# Altium PCB doan1_1.PcbDoc
Units mm, origin at the board's own origin, x right, y up, seen from the top; angles counter-clockwise.
Board outline 102.74 x 96.77 mm, 2 copper layers (Top Layer, Bottom Layer); 25 components, 19 nets, 95 pads, 0 vias.
Unrouted connection lines stored in the file: 3.
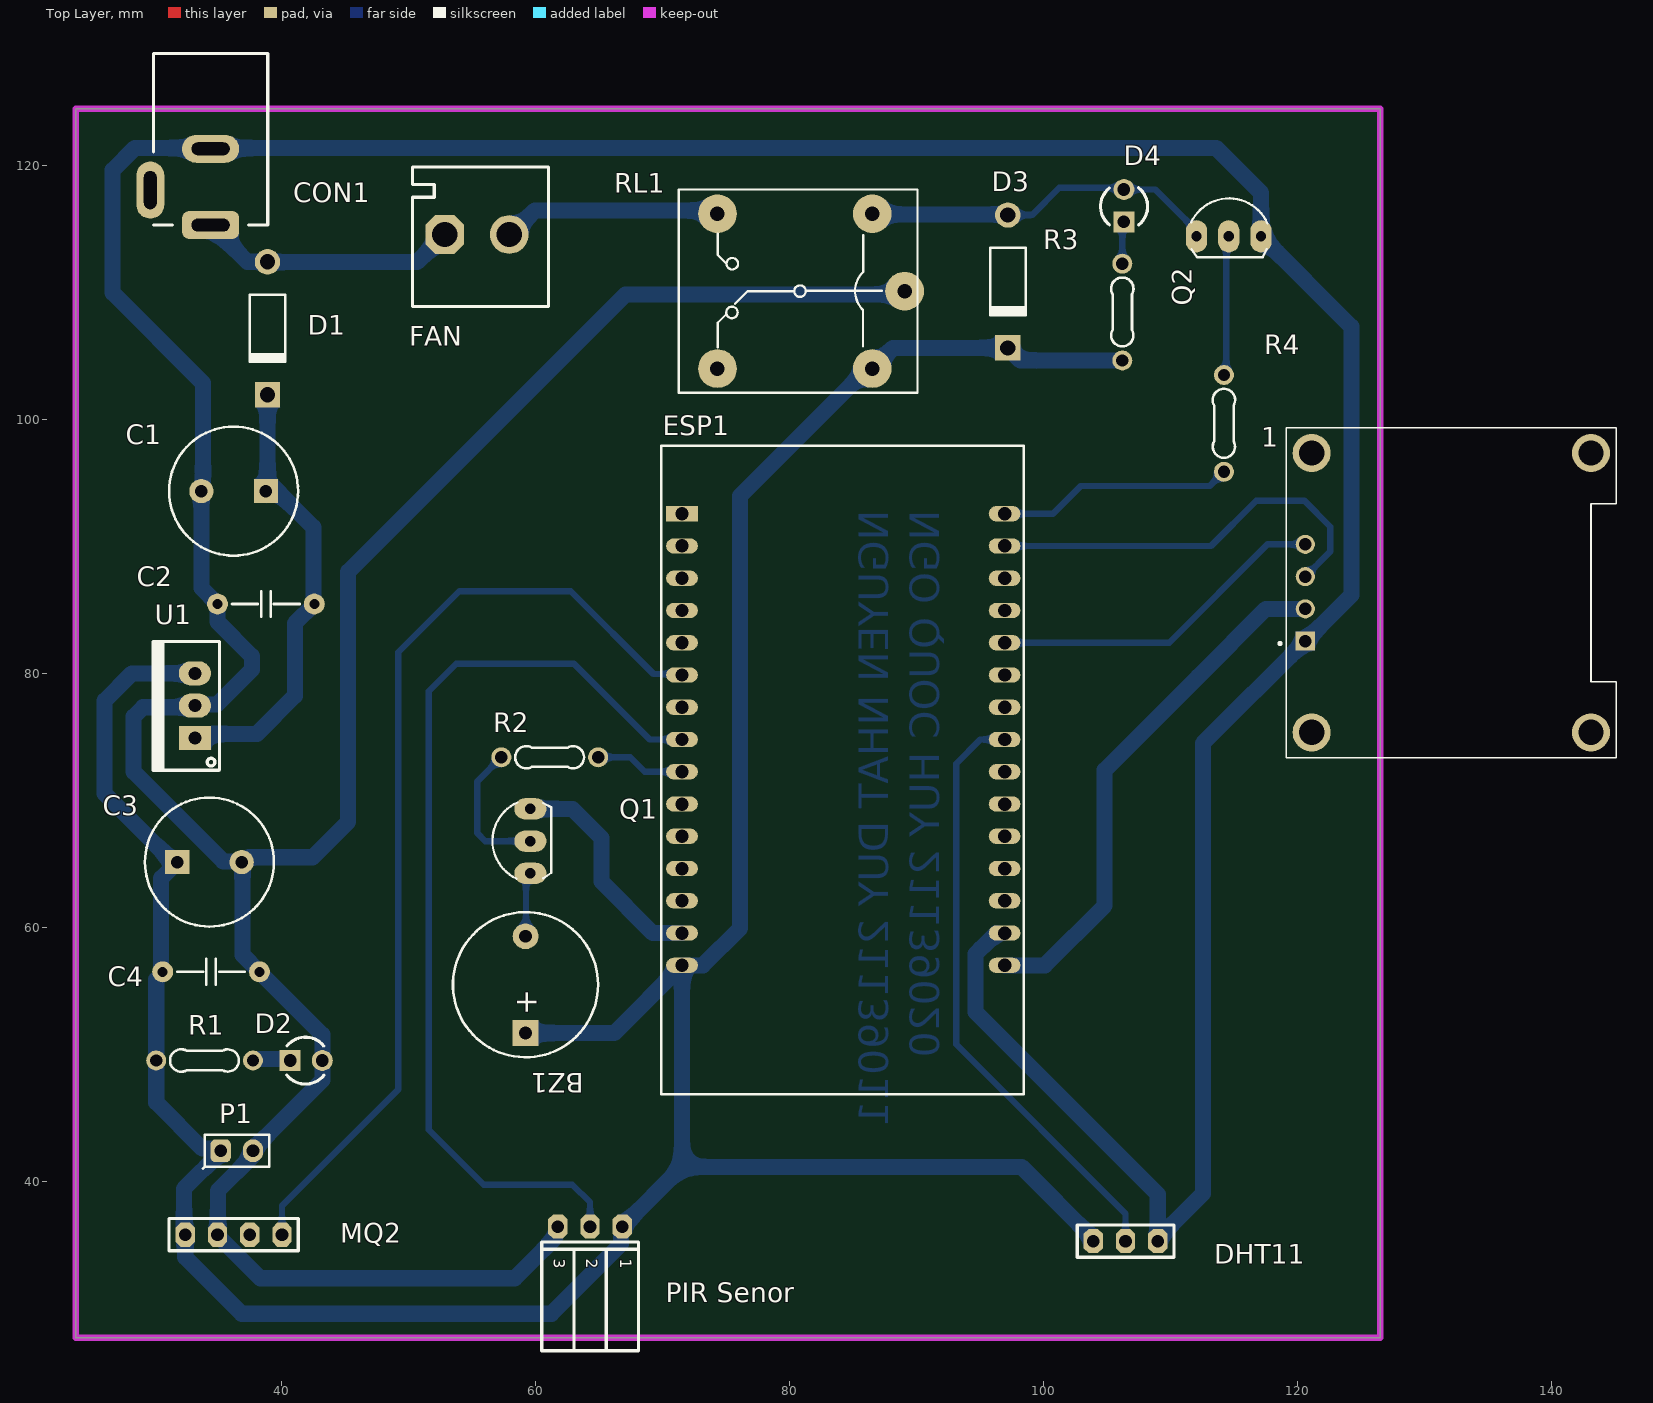
[diagram p0: Top Layer view]
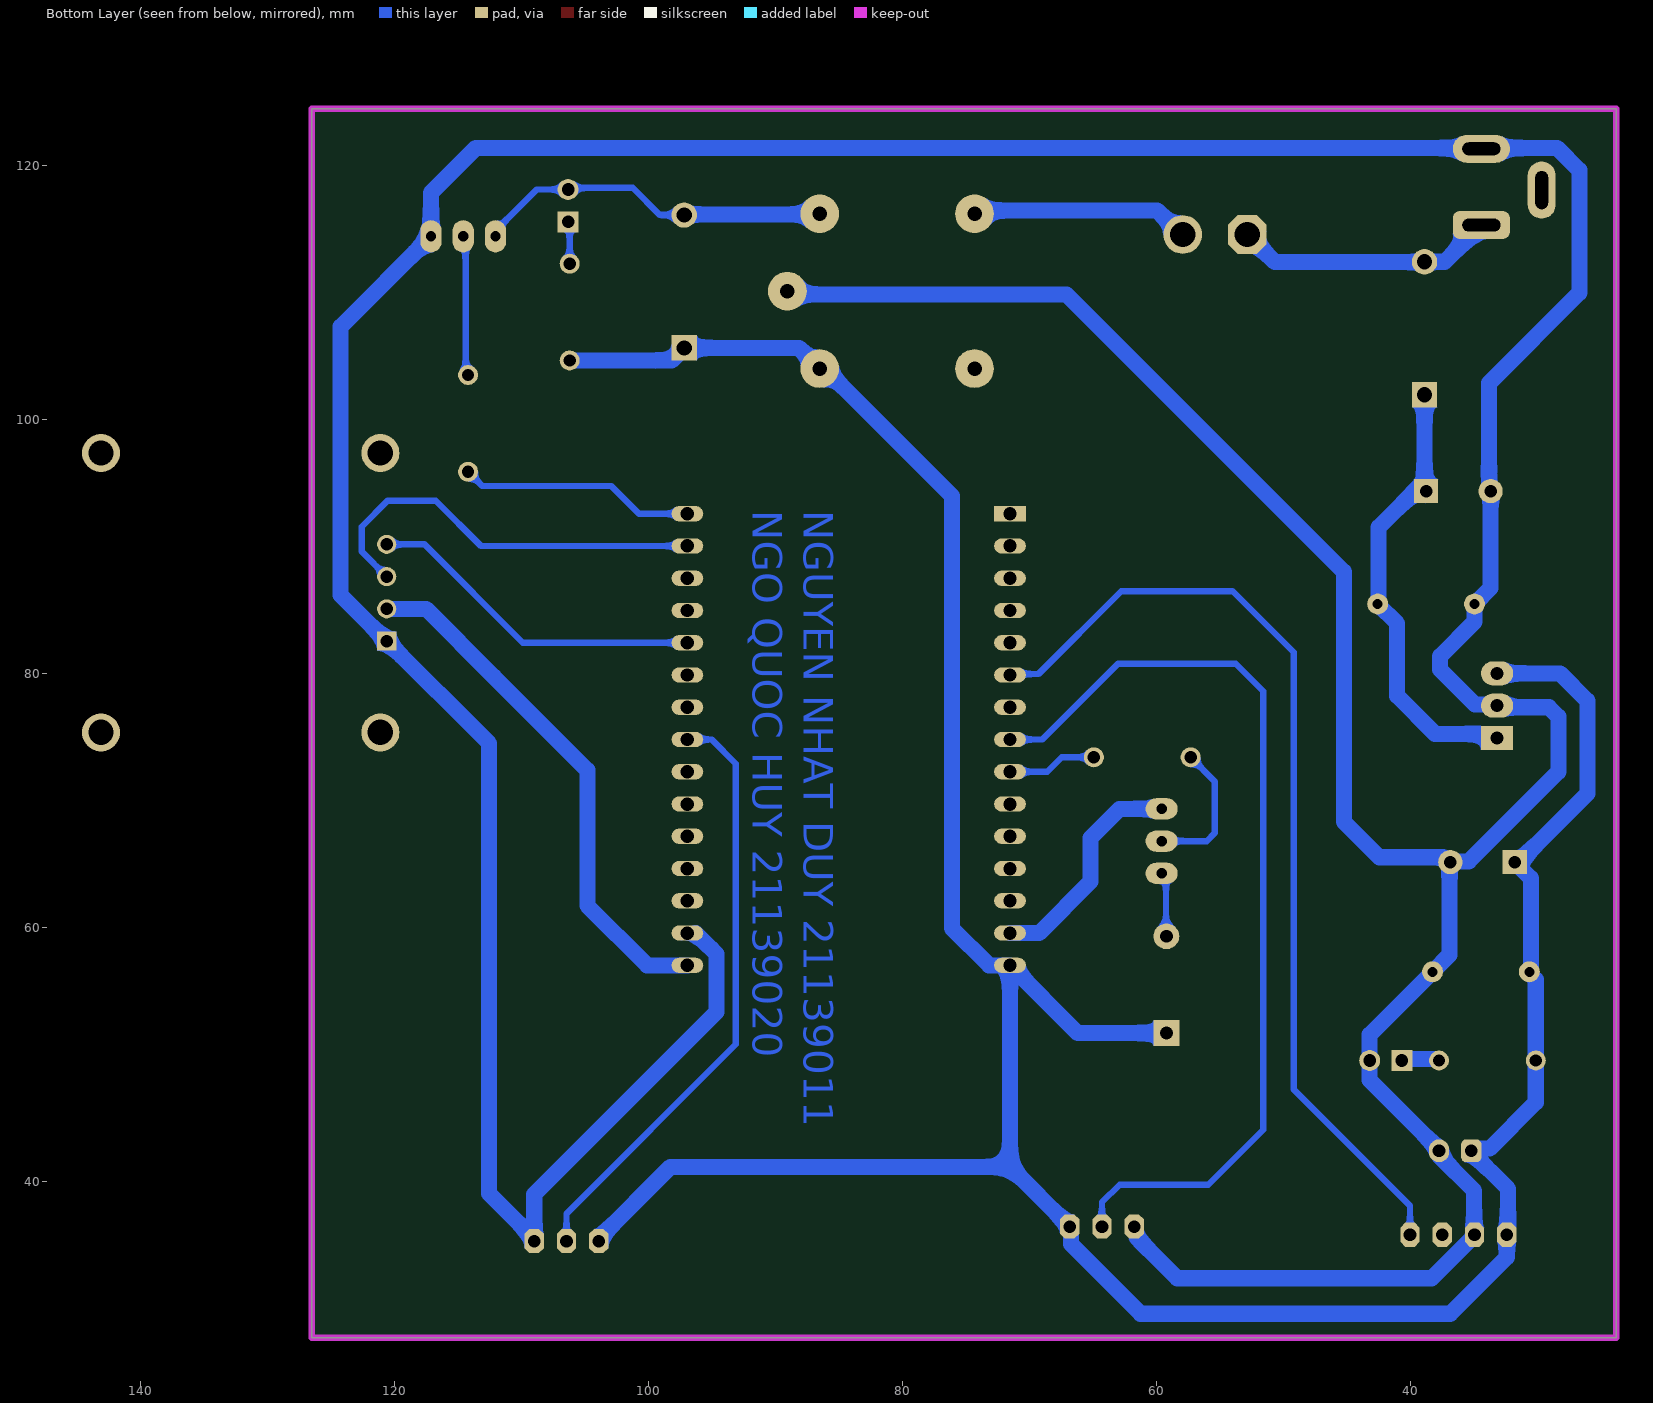
[diagram p1: Bottom Layer view, seen from below]
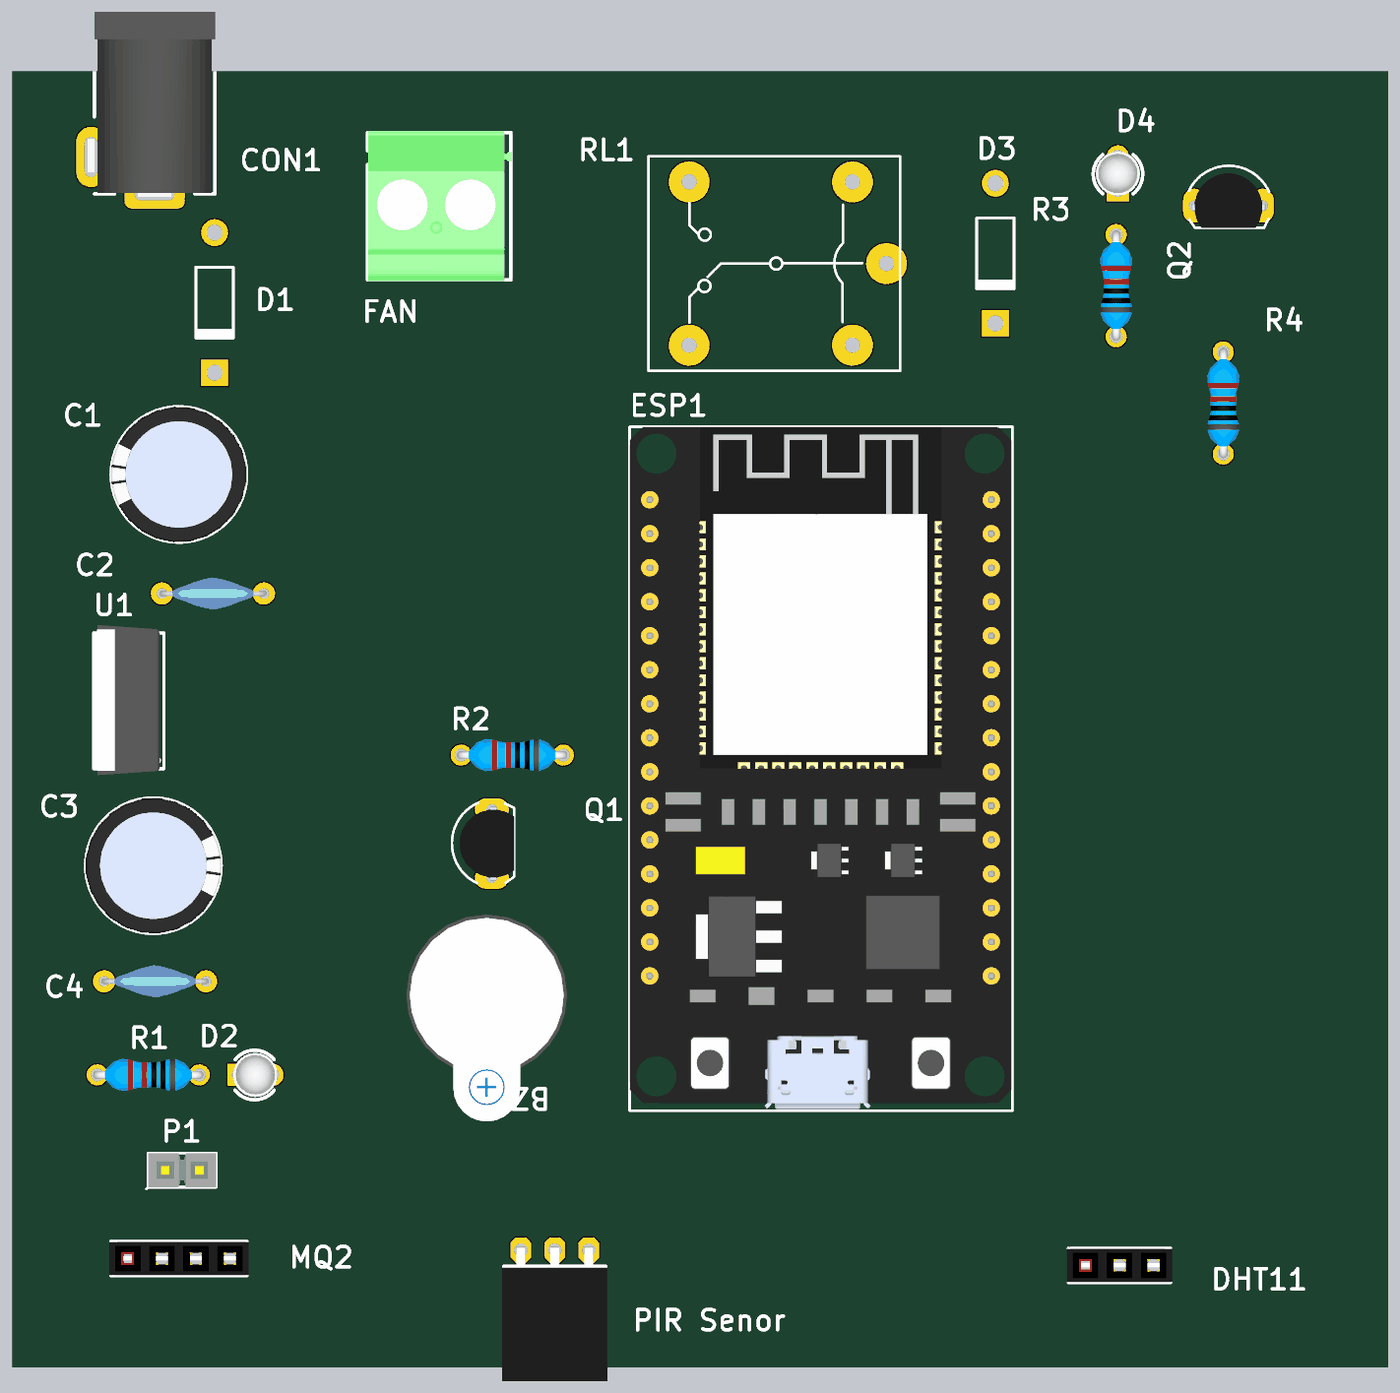
[diagram p2: 3D render of the assembled board from above, using the file's embedded part models]

## Layer stack, top to bottom
Top Solder: solder mask 0.0102, Solder Resist, Dk 3.5
Top Layer: signal copper 0.0356
Dielectric 1: dielectric 0.32, FR-4, Dk 4.8
Bottom Layer: signal copper 0.0356
Bottom Solder: solder mask 0.0102, Solder Resist, Dk 3.5

## Board outline
23.749,27.686 23.749,124.46 126.492,124.46 126.492,37.465 126.492,27.686

## Design rules (kind name [scope] priority, off if disabled: settings)
Clearance [All] p1: gap=0.254 ignorepadtopadclearanceinfootprint=FALSE except(0: Arc-Hole Track-Hole SMDPad-Hole THPad-Hole Via-Hole Fill-Hole Poly-Hole Region-Hole Text-Hole)
PolygonConnect [All] p1: connectstyle=Relief reliefconductorwidth=0.254 reliefentries=4 polygonreliefangle="90 Angle" airgapwidth=0.254
RoutingVias [All] p1: holewidth=0.711 width=1.27 viastyle="Through Hole" minholewidth=0.711 minwidth=1.27 maxholewidth=0.711 maxwidth=1.27
SolderMaskExpansion [All] p1: expansion=0.102 istentingtop=FALSE
Width [All] p1: maxlimit=0.254 minlimit=0.254 preferedwidth=0.254
30 further rules are at their usual default settings.

## Components (designator, comment, footprint, x,y, rotation, side; value= is the part's Value field where it differs from the comment)
1 "OLED_DISPLAY" MODULE_DM-OLED096-636 132.08,86.36 r90 top
BZ1 "Buzzer" BUZZER 59.182,51.689 r90 top
C1 "1000uF" CYL/D.400/LS.200 36.195,94.361 r180 top
C2 "104" "CAP Ceramic/W300" 42.545,85.471 r180 top
C3 "1000uF" CYL/D.400/LS.200 34.29,65.151 r0 top
C4 "104" "CAP Ceramic/W300" 30.607,56.515 r0 top
CON1 "CON DC PWR" CONN/DC/PWR/5.0MM 34.386,115.316 r270 top
D1 "Diode" DO-41 38.862,107.188 r270 top
D2 "Led" "LED 3MM - red" 41.91,49.53 r0 top
D3 "Diode" DO-41 97.155,110.871 r270 top
D4 "Led" "LED 3MM - red" 106.299,116.84 r90 top
DHT11 "Header 3" MY_FE03 106.426,35.306 r0 top
ESP1 "ESP32" "ESP32 WROOM 32 KIT" 71.501,92.583 r0 top
FAN "Header 2" My_CN2 55.499,114.554 r0 top
MQ2 "Header 4" MY_FE04 36.195,35.814 r0 top
P1 "Header 2" HDR/Header/2 36.449,42.418 r0 top
"PIR Senor" "Header 3" MY_FE03W 64.262,36.449 r180 top
Q1 "BC547" QTO-92 59.563,66.802 r90 top value=C1815
Q2 "BC547" QTO-92 114.554,114.427 r0 top value=C1815
R1 "220" "R 1/4W/300" 37.719,49.529 r180 top
R2 "220" "R 1/4W/300" 64.897,73.406 r180 top
R3 "1k" "R 1/4W/300" 106.172,104.648 r90 top
R4 "1k" "R 1/4W/300" 114.173,95.885 r90 top
RL1 "Relay 10A/5V" RL_SPDT_10A 89.027,110.109 r180 top value="Relay SPDT, 10A, 12V"
U1 "78xx" TO-220 33.147,74.93 r90 top

## Footprints (in the part's own frame and the unit in brackets; to place one, negate y for a bottom-side part, rotate by r counter-clockwise, add the part's x,y. Pads: shape width x height; smd on the part's side, far side on the other; paste and mask are expansions set on the pad)
BUZZER [mil]
  rect 80x80 hole 40: 1(0,0)
  round 80 hole 40: 2(300,0)
  silkscreen extent -75,-225 375,225, body extent -222,-236 386,236, height 380
"CAP Ceramic/W300" [mil]
  round 65 hole 31: 1(0,0) 2(300,0)
  silkscreen extent 45,-40 255,40, body extent -8,-47 307,47, height 340
CONN/DC/PWR/5.0MM [mm]
  rrect50% 2.2x4.5 hole 1 slot 3 at 90 deg: 1(0,0)
  oval 2.2x4.5 hole 1 slot 3 at 90 deg: 2(-6,0)
  oval 4.5x2.2 hole 1 slot 3 at 0 deg: 3(-2.75,-4.75)
  silkscreen extent -13.5,-4.5 0,4.5, body extent -13.58,-5 0.25,4.5, height 11.02
CYL/D.400/LS.200 [mil]
  rect 75x75 hole 39: 1(-100,0)
  round 75 hole 39: 2(100,0)
  silkscreen extent -200,-200 200,200, body extent -198,-199 200,199, height 500
DO-41 [mm] "Diode, Axial; Body 5.2 x 2.7 mm (LxDia. max), Lead Dia. 0.86 mm (max)"
  round 2 hole 1.2: 1(-5.23,0)
  rect 2x2 hole 1.2: 2(5.23,0)
  silkscreen extent -2.65,-1.4 2.75,1.4
"ESP32 WROOM 32 KIT" [mm]
  rect 2.5x1.2 hole 1.06: 1(0,0)
  oval 2.5x1.2 hole 1.06: 2(0,-2.54) 3(0,-5.08) 4(0,-7.62) 5(0,-10.16) 6(0,-12.7) 7(0,-15.24) 8(0,-17.78) 9(0,-20.32) 10(0,-22.86) 11(0,-25.4) 12(0,-27.94) 13(0,-30.48) 14(0,-33.02) 15(0,-35.56) 16(25.4,-35.56) 17(25.4,-33.02) 18(25.4,-30.48) 19(25.4,-27.94) 20(25.4,-25.4) 21(25.4,-22.86) 22(25.4,-20.32) 23(25.4,-17.78) 24(25.4,-15.24) 25(25.4,-12.7) 26(25.4,-10.16) 27(25.4,-7.62) 28(25.4,-5.08) 29(25.4,-2.54) 30(25.4,0)
  silkscreen extent -1.65,-45.72 26.92,5.33, body extent -1.65,-45.6 26.85,5.33, height 10.49
HDR/Header/2 [mm]
  rrect50% 1.6x1.8 hole 1: 1(-1.27,0)
  oval 1.6x1.8 hole 1: 2(1.27,0)
  silkscreen extent -2.67,-1.4 2.54,1.27, body extent -2.54,-1.27 2.54,1.27, height 8.89
"LED 3MM - red" [mil]
  rect 65x65 hole 39: 1(-50,0)
  round 65 hole 39: 2(50,0)
  silkscreen extent -60,-73 55,72, body extent -66,-65 64,65, height 207
MODULE_DM-OLED096-636 [mm]
  rect 1.508x1.508 / inner round 1.508 / far side rect 1.508x1.508 hole 1: 1(-3.81,11.5)
  round 1.508 hole 1: 2(-1.27,11.5) 3(1.27,11.5) 4(3.81,11.5)
  round 3 hole 2: S1(-11,11) S2(11,11) S3(11,-11) S4(-11,-11)
  silkscreen extent -13,-13 13,13.6, body extent -13,-13 13,13, height 5.66
My_CN2 [mil]
  oct 120x120 hole 78.74: 1(-105.5,0.5)
  round 120 hole 78.74: 2(94.5,0.5)
  silkscreen extent -206,-223 216,210, body extent -203,-227 219,214, height 721
MY_FE03 [mm]
  oct 1.524x1.905 hole 1: 1(-2.54,0) 2(0,0) 3(2.54,0)
  silkscreen extent -3.81,-1.27 3.81,1.27, body extent -3.93,-1.25 3.94,1.25, height 8.5
MY_FE03W [mm]
  oct 1.524x1.905 hole 1: 1(-2.54,0) 2(0,0) 3(2.54,0)
  silkscreen extent -3.81,1.22 3.81,9.78, body extent -3.93,-0.25 3.94,9.81, height 2.52
MY_FE04 [mm]
  oct 1.524x1.905 hole 1: 1(-3.81,0) 2(-1.27,0) 3(1.27,0) 4(3.81,0)
  silkscreen extent -5.08,-1.27 5.08,1.27, body extent -5.2,-1.25 5.21,1.25, height 8.5
QTO-92 [mil]
  oval 66x100 hole 32: 1(-100,0) 2(0,0) 3(100,0)
  silkscreen extent -117,-65 120,118, body extent -109,-66 109,95, height 385
"R 1/4W/300" [mil] "Through hole resitor, axial 300mils, 1/4W"
  round 62 hole 38: 1(0,0) 2(300,0)
  silkscreen extent 44,-35 257,35, body extent -12,-47 312,47, height 97
RL_SPDT_10A [mil] "Relay SPDT, 5 pin, 10A,W 650mil, L 800mil, H 800mil"
  round 120 hole 45: 1(0,0) 2(580,240) 3(580,-240) 4(100,-240) 5(100,240)
  silkscreen extent -40,-315 700,315, body extent -40,-315 700,315, height 630
TO-220 [mil]
  rect 75x100 hole 40: 1(0,0)
  oval 75x100 hole 40: 2(100,0) 3(200,0)
  silkscreen extent -100,-76 300,130, body extent -119,-64 322,121, height 755

## Part data
1: library part DM-OLED096-636, "0.96â€ 128 X 64 MONOCHROME GRAPHIC OLED DISPLAY MODULE - I2C", Package=Package, Check_prices=https://www.snapeda.com/parts/DM-OLED096-636/Display+Module/view-part/?ref=eda, MF="Display Module", MP=DM-OLED096-636, SnapEDA_Link=https://www.snapeda.com/parts/DM-OLED096-636/Display+Module/view-part/?ref=snap
C1 C3: library part Capacitor, "Capacitor pol"
C2 C4: library part "Capacitor NP", "Capacitor non-pol"
CON1: "DC input connector"
D1 D3: "Default Diode"
D2 D4: "Typical LED"
DHT11 "PIR Senor": "Header, 3-Pin", ASiD Part Number="Header 3-AS"
ESP1: library part "ESP32 WROOM 32 KIT"
FAN: "Header, 2-Pin", ASiD Part Number="Header 2-AS"
MQ2: "Header, 4-Pin", ASiD Part Number="Header 4-AS"
P1: "Header, 2-Pin"
Q1 Q2: library part C1815, "NPN 600mW, ECB"
R1 R2 R3 R4: library part Resistor, "Resistor"
RL1: library part "Relay 1", "Relay SPDT,10A - 12VDC 5 Pin"
U1: "LDO Fixed Voltage regulator"

## Nets (pads, with @x,y where several pads share a name; then routed paths per layer and width w, separated by ;. In a path a pad name is that pad's centre, name@x,y a point inside that pad or via, vN(x,y) a via of type N, cw(c..) or ccw(c..) an arc to the next point about the centre after c; other vN are vias at no path point)
3V3: 1.2 ESP1.16 | length 41.6
  Bottom Layer w1.27: ESP1.16 100.076,57.023 104.775,61.722 104.775,72.39 112.141,79.756 117.475,85.09 1.2
+5: "PIR Senor.1" BZ1.1 C3.1 C4.1 D3.2 DHT11.1 ESP1.15 MQ2.1 P1.1 R1.2 R3.1 RL1.5 U1.3 | length 248.8
  Bottom Layer w0.254: P1.1@35.179,42.318 P1.1 ; DHT11.1 DHT11.1@103.886,35.496
  Bottom Layer w1.27: C4.1@30.534,56.569 30.534,56.857 30.48,56.911 30.48,63.881 C3.1 ; C4.1 30.607,56.412 30.099,55.904 30.099,52.705 R1.2 30.099,46.228 33.734,42.593 35.014,42.593 35.179,42.428 P1.1 ; C3.1@31.432,65.151 31.432,65.468 31.115,65.468 26.035,70.549 26.035,77.851 28.194,80.01 U1.3 ; P1.1@35.179,42.318 32.284,39.423 32.284,35.633 32.385,35.532 32.385,34.036 36.83,29.591 61.214,29.591 66.693,35.07 66.693,36.34 66.802,36.449 71.501,41.148 ; 37.719,49.657 40.64,49.657 ; BZ1.1 66.167,51.689 ESP1.15 ; RL1.5@85.956,103.863 76.073,93.98 76.073,59.944 73.152,57.023 ESP1.15 ; RL1.5@86.147,103.673 RL1.5 88.115,105.641 D3.2 98.148,104.648 R3.1 ; DHT11.1@103.886,35.496 98.234,41.148 71.501,41.148 ; 71.501,41.148 ESP1.15
+12: CON1.1 D1.1 FAN.1 | length 19.9
  Bottom Layer w1.27: CON1.1 35.182,114.851 35.182,114.52 37.284,112.418 D1.1 ; D1.1@39.582,112.395 50.648,112.395 FAN.1
BUZ: ESP1.9 R2.1 | length 7.1
  Bottom Layer w0.5: R2.1 67.437,73.406 68.58,72.263 ESP1.9
DHT: DHT11.2 ESP1.23 | length 47.7
  Bottom Layer w0.5: ESP1.23 94.996,74.803 93.091,72.898 93.091,50.8 106.426,37.465 DHT11.2
FAN: ESP1.30 R4.1 | length 18.6
  Bottom Layer w0.5: ESP1.30 100.711,92.583 102.889,94.761 113.049,94.761 R4.1
GND: 1.1 "PIR Senor.3" C1.2 C2.2 C3.2 C4.2 CON1.2 D2.2 DHT11.3 ESP1.14 ESP1.17 MQ2.2 P1.2 Q1.3 Q2.3 RL1.1 U1.2 | length 451.1
  Bottom Layer w0.254: P1.2@37.719,42.037 P1.2 ; 61.511,35.56 61.511,36.238 61.722,36.449 ; ESP1.17@96.251,59.563 ESP1.17 ; DHT11.3 DHT11.3@108.966,35.496
  Bottom Layer w1.27: U1.2 33.231,77.554 34.882,77.554 37.637,80.309 37.637,81.362 34.925,84.074 C2.2 33.655,86.741 C1.2 ; U1.2@33.343,77.348 29.065,77.348 28.321,76.605 28.321,72.263 35.381,65.203 36.778,65.203 C3.2 C3.2@36.893,65.151 ; C1.2@33.782,95.123 33.782,102.87 26.67,109.982 26.67,119.634 28.415,121.379 113.571,121.379 117.094,117.856 Q2.3 124.206,107.315 124.206,86.176 1.1 112.522,74.492 112.522,39.052 108.966,35.496 108.966,38.989 94.615,53.34 94.615,57.927 ESP1.17@96.251,59.563 ; MQ2.2@34.925,35.633 MQ2.2 ; MQ2.2@34.951,36.367 34.951,39.269 P1.2@37.719,42.037 ; MQ2.2@35.183,35.506 38.303,32.385 58.336,32.385 61.511,35.56 ; P1.2 37.827,42.526 37.827,42.626 43.18,47.979 D2.2 43.18,51.562 C4.2 36.893,57.848 C3.2@36.893,65.151 ; Q1.3 62.865,69.342 65.151,67.056 65.151,63.627 69.215,59.563 ESP1.14 ; RL1.1@89.262,109.855 67.056,109.855 45.212,88.011 45.212,68.326 42.418,65.532 37.383,65.532 37.002,65.151 C3.2@36.893,65.151
MQ: ESP1.6 MQ2.4 | length 76.8
  Bottom Layer w0.5: MQ2.4@40.031,35.84 MQ2.4 40.005,38.1 49.149,47.244 49.149,68.834 49.149,81.661 53.975,86.487 62.738,86.487 69.261,79.964 71.42,79.964 ESP1.6
NetBZ1_2: BZ1.2 Q1.1 | length 5.1
  Bottom Layer w0.5: BZ1.2 59.22,59.347 59.22,63.919 Q1.1
NetC1_1: C1.1 C2.1 D1.2 U1.1 | length 35.5
  Bottom Layer w1.27: U1.1 33.465,75.248 38.036,75.248 41.021,78.232 41.021,83.947 C2.1 ; D1.2@38.862,102.246 38.862,95.123 42.472,91.513 C2.1@42.472,85.398
NetD2_1: D2.1 R1.1
NetD3_1: D3.1 D4.2 Q2.1 RL1.4 | length 28.5
  Bottom Layer w0.254: D4.2@106.172,118.237 D4.2 ; Q2.1 Q2.1@112.014,114.859
  Bottom Layer w0.5: D3.1 99.083,116.101 101.219,118.237 D4.2@106.172,118.237 ; D4.2 108.763,118.11 Q2.1@112.014,114.859 ; Q2.1@111.887,114.3 Q2.1
  Bottom Layer w1.27: RL1.4 86.539,116.153 97.103,116.153 D3.1
NetD4_1: D4.1 R3.2 | length 3.4
  Bottom Layer w0.254: D4.1@106.172,115.443 D4.1
  Bottom Layer w0.5: R3.2 D4.1@106.172,115.443
NetFAN_2: FAN.2 RL1.3 | length 17.3
  Bottom Layer w1.27: FAN.2 58.021,114.567 59.913,116.459 74.041,116.459 RL1.3
NetQ1_2: Q1.2 R2.2 | length 11.2
  Bottom Layer w0.5: R2.2 55.372,71.501 55.372,67.437 56.007,66.802 Q1.2
NetQ2_2: Q2.2 R4.2 | length 11.1
  Bottom Layer w0.254: R4.2 R4.2@114.364,103.695 ; Q2.2@114.364,114.236 Q2.2
  Bottom Layer w0.5: R4.2@114.364,103.695 Q2.2@114.364,114.236
PIR: "PIR Senor.2" ESP1.8 | length 74.8
  Bottom Layer w0.5: 64.262,36.449 64.262,38.354 62.865,39.751 55.88,39.751 51.562,44.069 51.562,78.613 53.721,80.772 62.992,80.772 68.961,74.803 ESP1.8
SCL: 1.3 ESP1.29 | length 32.7
  Bottom Layer w0.5: ESP1.29 113.157,90.043 116.713,93.599 120.523,93.599 122.555,91.567 122.555,89.605 1.3
SDA: 1.4 ESP1.26 | length 26.9
  Bottom Layer w0.5: ESP1.26 109.855,82.423 117.602,90.17 1.4
pads on no net: 1.S1 1.S2 1.S3 1.S4 CON1.3 ESP1.1 ESP1.2 ESP1.3 ESP1.4 ESP1.5 ESP1.7 ESP1.10 ESP1.11 ESP1.12 ESP1.13 ESP1.18 ESP1.19 ESP1.20 ESP1.21 ESP1.22 ESP1.24 ESP1.25 ESP1.27 ESP1.28 MQ2.3 RL1.2

## Keep-outs
Keep-Out Layer:
  the board outline again, w0.508

## Other copper
Bottom Layer:
  text "NGUYEN NHAT DUY 21139011 / NGO QUOC HUY 21139020" at 92.534,92.837 h4 r90

## Text inside footprints (layer, text, board x,y; h text height)
BZ1: Top Overlay "+" at 60.071,53.086 h1.78 r90
"PIR Senor": Top Overlay "1" at 66.312,33.909 h1.52 r270; Top Overlay "2" at 63.627,33.909 h1.52 r270; Top Overlay "3" at 61.087,33.909 h1.52 r270